# EAGLE board charlieplate3 (EAGLE 6.2)
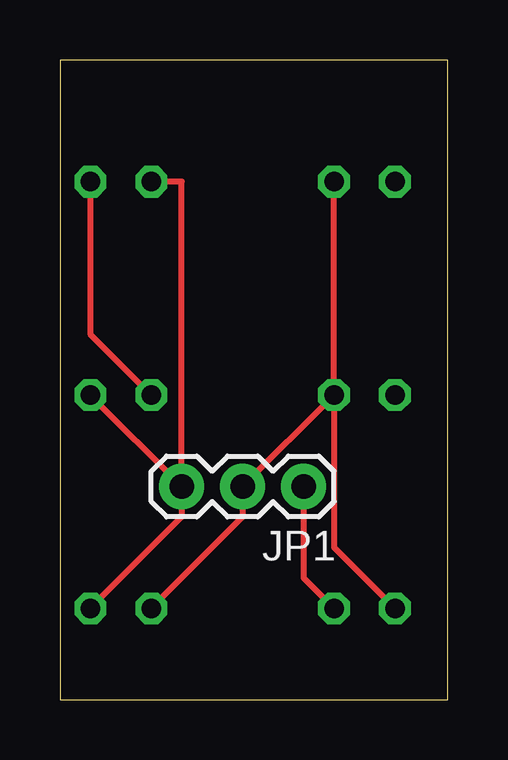
[diagram p0: board, top side]
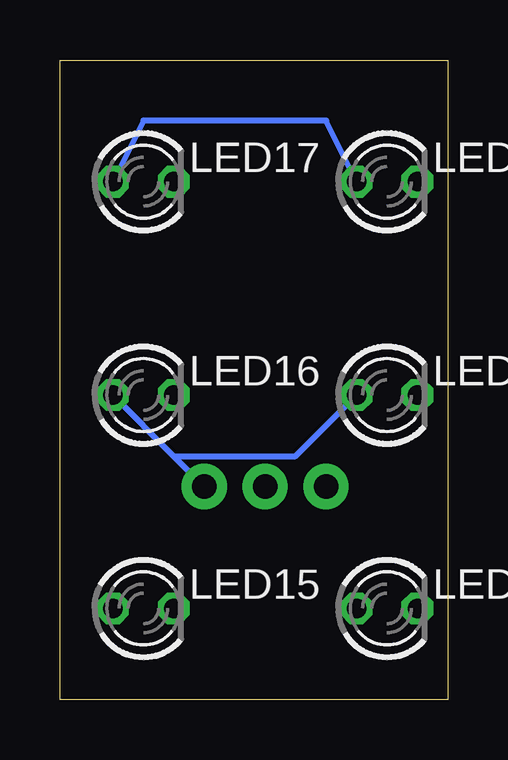
[diagram p1: board, bottom side, seen from below]

Size 16.18 x 26.66 mm. Coordinates in mm from the lower left corner, seen from the top.
Outline: 0,0 16.18,0 16.18,26.66 0,26.66 0,0
Copper layers (1*16): Top 0.035mm / dielectric 1.5mm / Bottom 0.035mm
Design rules: minimum track width 10mil, minimum drill 24mil, track to track 8mil, track to pad 8mil, pad to pad 8mil, via to via 8mil, smd to smd 8mil, copper to edge 40mil, drill to drill 8mil, minimum pad ring 10mil, minimum via ring 8mil, stop-mask expansion 4mil, vias tented up to drill 0mil, thermal gap 10mil

## Footprints (pad centres in the part's own frame; a part is rotated, then mirrored left to right if it is on the bottom)
1X03 = drill 1.016 pad 1.88: 1 0,0; 2 2.54,0; 3 5.08,0
LED3MM = drill 0.813 octagon: A -1.27,0; K 1.27,0

## Placement (x,y rotation side)
JP1  [1X03]  10.16,8.89 180 top
LED15  [LED3MM]  12.7,3.81 0 bottom
LED16  [LED3MM]  12.7,12.7 0 bottom
LED17  [LED3MM]  12.7,21.59 0 bottom
LED18  [LED3MM]  2.54,3.81 0 bottom
LED20  [LED3MM]  2.54,12.7 0 bottom
LED22  [LED3MM]  2.54,21.59 0 bottom

## Library data of the parts
JP1 = SparkFun
LED15-LED18 LED20 LED22 = 0-svo

## Nets
N$5: JP1.1 LED15.K LED16.A LED20.A LED22.K
N$9: JP1.3 LED17.A LED18.K LED20.K LED22.A
N$16: JP1.2 LED15.A LED16.K LED17.K LED18.A

## Tracks (layer width: path | path; a pad name or v marks a point on that pad's centre or on a via)
N$5
  Top 0.254: LED20.A 1.27,15.24 LED22.K | LED15.K 10.16,5.08 JP1.1
  Bottom 0.254: JP1.1 11.43,10.16 | 11.43,10.16 LED16.A | LED20.A 6.35,10.16 11.43,10.16
N$9
  Top 0.254: LED18.K 5.08,7.62 JP1.3 | JP1.3 LED20.K | LED22.A 5.08,21.59 JP1.3
  Bottom 0.254: LED17.A 12.7,24.13 5.08,24.13 LED22.A
N$16
  Top 0.254: LED18.A 7.62,7.62 JP1.2 LED16.K | LED15.A 11.43,6.35 LED16.K | LED16.K LED17.K